# Altium PCB LCD1602接线模块.PCBDOC
Units mm, origin at the board's own origin, x right, y up, seen from the top; angles counter-clockwise.
Board outline 152.4 x 101.6 mm, 2 copper layers (Top Layer, Bottom Layer); 7 components, 14 nets, 47 pads, 0 vias.
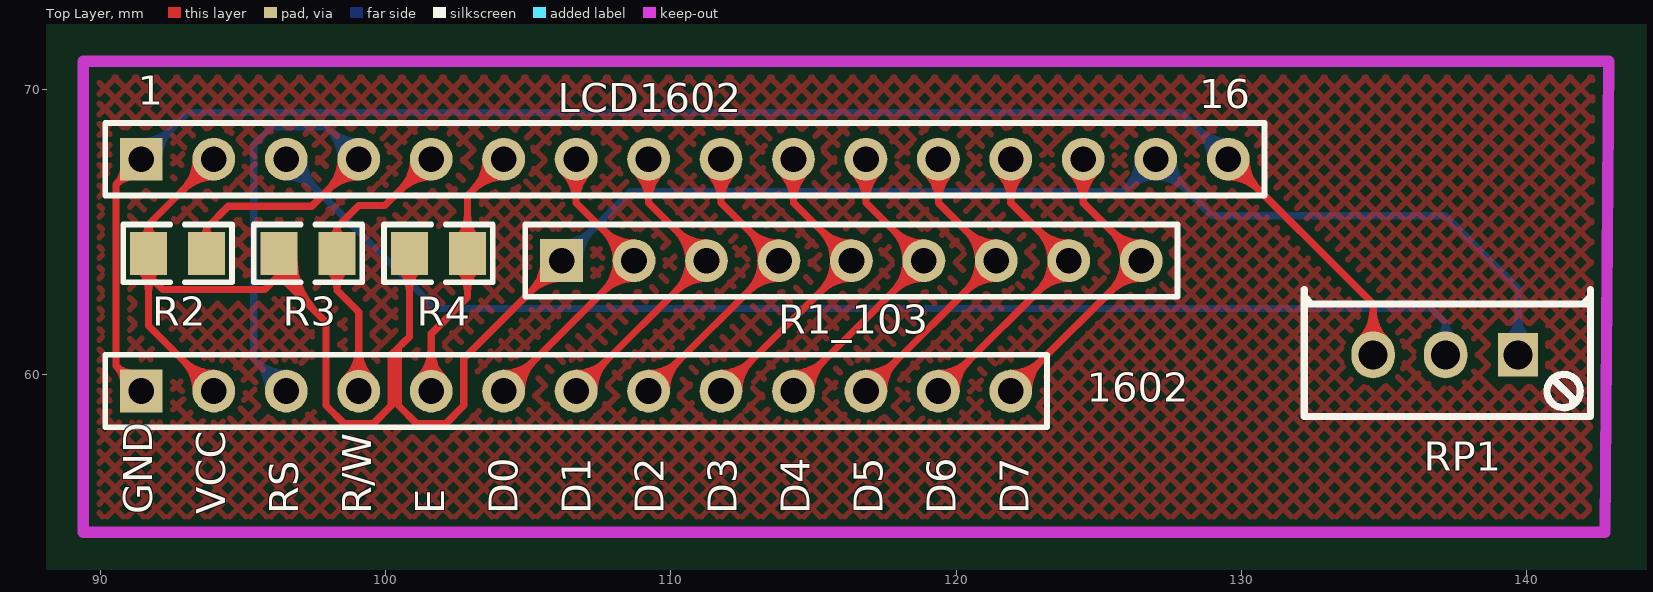
[diagram p0: Top Layer view]
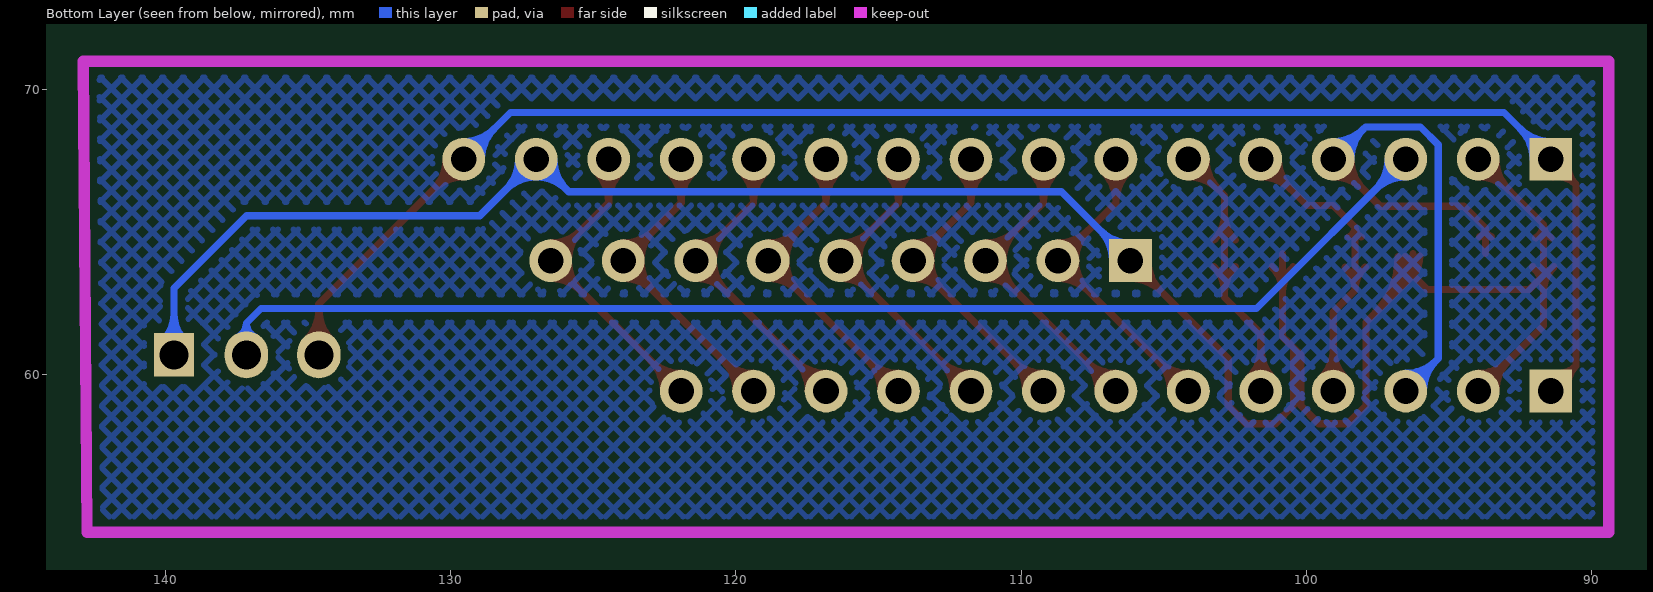
[diagram p1: Bottom Layer view, seen from below]

## Layer stack, top to bottom
Top Layer: signal copper 0.0356
Dielectric: dielectric 0.32, FR-4, Dk 4.8
Bottom Layer: signal copper 0.0356

## Board outline
25.4,25.4 177.8,25.4 177.8,127 25.4,127

## Design rules (kind name [scope] priority, off if disabled: settings)
Clearance [All] p1: gap=0.254
ComponentClearance [All] p1: gap=0.254 collisioncheckmode=3 verticalgap=0.254
PolygonConnect [All] p1: connectstyle=Relief reliefconductorwidth=0.254 reliefentries=4 polygonreliefangle="90 Angle"
RoutingVias [All] p1: holewidth=0.711 width=1.27 viastyle="Through Hole" minholewidth=0.711 minwidth=1.27 maxholewidth=0.711 maxwidth=1.27
SolderMaskExpansion [All] p1: expansion=0.102
TestPointUsage [All] p1: valid=0 allowmultiple=FALSE
Testpoint [All] p1: side=15 testpointundercomponent=TRUE minsize=1.016 maxsize=2.54 preferedsize=1.524 minholesize=0 maxholesize=1.016 preferedholesize=0.813 testpointgrid=0.025 style=1023 order=0123456789
Width [All] p1: maxlimit=0.254 minlimit=0.254 preferedwidth=0.254
17 further rules are at their usual default settings.

## Components (designator, comment, footprint, x,y, rotation, side; value= is the part's Value field where it differs from the comment)
1602 "Header 13" HDR1X13 91.44,59.436 r0 top
LCD1602 "Header 16" HDR1X16 91.44,67.564 r0 top
R1_103 "Header 9" HDR1X9 106.172,64.008 r0 top
R2 "Res" TP-0805-R 90.17,65.532 r180 top
R3 "Res" TP-0805-R 94.742,65.532 r180 top
R4 "Res" TP-0805-R 99.314,65.532 r180 top
RP1 "Res _JT" SIP3-D 139.7,60.96 r180 top

## Footprints (in the part's own frame and the unit in brackets; to place one, negate y for a bottom-side part, rotate by r counter-clockwise, add the part's x,y. Pads: shape width x height; smd on the part's side, far side on the other; paste and mask are expansions set on the pad)
HDR1X9 [mm] "Connector; Header; 9 Position"
  rect 1.5x1.5 hole 0.9: 1(0,0)
  round 1.5 hole 0.9: 2(2.54,0) 3(5.08,0) 4(7.62,0) 5(10.16,0) 6(12.7,0) 7(15.24,0) 8(17.78,0) 9(20.32,0)
  silkscreen extent -1.27,-1.27 21.59,1.27
HDR1X13 [mm] "Connector; Header; 13 Position"
  rect 1.5x1.5 hole 0.9: 1(0,0)
  round 1.5 hole 0.9: 2(2.54,0) 3(5.08,0) 4(7.62,0) 5(10.16,0) 6(12.7,0) 7(15.24,0) 8(17.78,0) 9(20.32,0) 10(22.86,0) 11(25.4,0) 12(27.94,0) 13(30.48,0)
  silkscreen extent -1.27,-1.27 31.75,1.27
HDR1X16 [mm] "Connector; Header; 16 Position"
  rect 1.5x1.5 hole 0.9: 1(0,0)
  round 1.5 hole 0.9: 2(2.54,0) 3(5.08,0) 4(7.62,0) 5(10.16,0) 6(12.7,0) 7(15.24,0) 8(17.78,0) 9(20.32,0) 10(22.86,0) 11(25.4,0) 12(27.94,0) 13(30.48,0) 14(33.02,0) 15(35.56,0) 16(38.1,0)
  silkscreen extent -1.27,-1.27 39.37,1.27
SIP3-D [mil] "精调电位器"
  rect 55x60 hole 40: 1(0,10)
  oval 60x65 hole 40: 2(200,10) 3(100,10)
  silkscreen extent -100,-80 295,95
TP-0805-R [mm] "贴片0805"
  rect 1.3x1.5 smd: 1(-3.556,1.27) 2(-1.524,1.27)
  silkscreen extent -4.44,0.25 -0.64,2.29

## Part data
1602: "Header, 13-Pin"
LCD1602: "Header, 16-Pin"
R1_103: "Header, 9-Pin"
R2 R3 R4: "电阻"
RP1: "j精调电阻"

## Nets (pads, with @x,y where several pads share a name; then routed paths per layer and width w, separated by ;. In a path a pad name is that pad's centre, name@x,y a point inside that pad or via, vN(x,y) a via of type N, cw(c..) or ccw(c..) an arc to the next point about the centre after c; other vN are vias at no path point)
BLA: 1602.2 LCD1602.2 LCD1602.15 R1_103.1 R2.2 R3.2 R4.2 RP1.1 | length 119.1
  Top Layer w0.254: R2.2@91.324,63.792 cw(c90.431,62.899) 91.694,62.899 cw(c92.957,62.899) R2.2@92.064,63.792 ; R2.2@91.428,64.812 ccw(c91.153,65.278) 91.694,65.278 ; R2.2@91.96,64.812 cw(c92.235,65.278) 91.694,65.278 ; 1602.2@93.357,59.436 ccw(c91.853,59.436) 92.916,60.5 ccw(c93.98,61.563) 1602.2@93.98,60.059 ; LCD1602.2@93.357,67.564 cw(c91.853,67.564) 92.916,66.5 cw(c93.98,65.437) LCD1602.2@93.98,66.941 ; 1602.2@93.611,59.436 ccw(c92.72,59.436) 93.35,60.066 ccw(c93.98,60.696) 1602.2@93.98,59.805 ; LCD1602.2@93.611,67.564 cw(c92.72,67.564) 93.35,66.934 cw(c93.98,66.304) LCD1602.2@93.98,67.195 ; 1602.2 91.694,61.722 91.694,63.5 ; LCD1602.2 91.694,65.278 ; R3.2@96.027,64.166 ccw(c97.016,64.149) 96.317,63.449 ; R3.2 96.266,63.5 ; R3.2@96.281,64.162 ccw(c97.848,64.134) 96.74,63.026 ; R3.2@96.535,64.157 ccw(c98.679,64.12) 97.163,62.603 ; R3.2@96.789,64.153 ccw(c99.511,64.105) 97.586,62.18 ; R4.2@100.468,63.792 cw(c99.575,62.899) 100.838,62.899 cw(c102.101,62.899) R4.2@101.208,63.792 ; R4.2 100.838,61.671 100.838,61.341 100.622,61.125 100.457,60.96 ; R1_103.1@105.549,64.008 cw(c104.045,64.008) 105.108,62.944 cw(c106.172,61.881) R1_103.1@106.172,63.385 ; R1_103.1@105.803,64.008 cw(c104.912,64.008) 105.542,63.378 cw(c106.172,62.748) R1_103.1@106.172,63.639 ; R1_103.1 102.743,60.579 102.743,58.928 102.108,58.293 101.092,58.293 100.457,58.928 100.457,60.96 ; R2.2@91.573,63.653 cw(c91.537,63.5) 91.694,63.5 ; R2.2@91.573,63.653 cw(c91.537,63.5) 91.694,63.5 ; R2.2@91.573,63.653 cw(c91.537,63.5) 91.694,63.5 ; 91.694,63.5 cw(c91.851,63.5) R2.2@91.815,63.653 ; 91.694,63.5 cw(c91.851,63.5) R2.2@91.815,63.653 ; 91.694,63.5 cw(c91.851,63.5) R2.2@91.815,63.653 ; 91.694,63.5 92.202,62.992 95.758,62.992 96.266,63.5 ; 91.694,63.5 R2.2 91.694,65.278 ; 96.266,63.5 cw(c96.423,63.5) 96.387,63.653 ccw(c96.423,63.5) 96.266,63.5 ; 96.266,63.5 ccw(c96.109,63.5) 96.145,63.653 cw(c96.109,63.5) 96.266,63.5 ; 96.266,63.5 97.917,61.849 97.917,58.928 98.552,58.293 99.568,58.293 100.203,58.928 100.203,60.706 100.457,60.96
  Bottom Layer w0.254: R1_103.1 108.585,66.421 125.857,66.421 LCD1602.15 128.981,65.583 137.16,65.583 139.7,63.043 RP1.1 ; R1_103.1@106.172,64.377 ccw(c106.172,65.268) 106.802,64.638 ccw(c107.432,64.008) R1_103.1@106.541,64.008 ; R1_103.1@106.172,64.631 ccw(c106.172,66.135) 107.236,65.072 ccw(c108.299,64.008) R1_103.1@106.795,64.008 ; LCD1602.15@126.377,67.564 cw(c124.873,67.564) 125.936,66.5 cw(c127,65.437) 127,66.941 cw(c127,65.437) 128.064,66.5 cw(c129.127,67.564) LCD1602.15@127.623,67.564 ; LCD1602.15@126.631,67.564 cw(c125.74,67.564) 126.37,66.934 cw(c127,66.304) 127,67.195 cw(c127,66.304) 127.63,66.934 cw(c128.26,67.564) LCD1602.15@127.369,67.564 ; RP1.1@139.296,61.174 ccw(c138.32,62.149) 139.7,62.149 ccw(c141.08,62.149) RP1.1@140.104,61.174 ; RP1.1@139.475,60.994 ccw(c138.933,61.536) 139.7,61.536 ccw(c140.467,61.536) RP1.1@139.925,60.994
BLK: 1602.1 LCD1602.1 LCD1602.16 RP1.2 | length 75.9
  Top Layer w0.254: 1602.1@90.823,59.52 ccw(c89.874,59.648) 90.551,60.325 ; LCD1602.1@90.823,67.48 cw(c89.874,67.352) 90.551,66.675 ; 1602.1@91.356,60.053 cw(c91.228,61.002) 90.551,60.325 ; LCD1602.1@91.356,66.947 ccw(c91.228,65.998) 90.551,66.675 ; 1602.1 90.551,60.325 ; LCD1602.1 90.551,66.675 ; LCD1602.16@129.54,66.941 cw(c129.54,65.437) 130.604,66.5 cw(c131.667,67.564) LCD1602.16@130.163,67.564 ; LCD1602.16@129.54,67.195 cw(c129.54,66.304) 130.17,66.934 cw(c130.8,67.564) LCD1602.16@129.909,67.564 ; LCD1602.16 134.62,62.484 RP1.2 ; RP1.2@134.171,61.219 ccw(c133.087,62.303) 134.62,62.303 ccw(c136.153,62.303) RP1.2@135.069,61.219 ; RP1.2@134.351,61.039 ccw(c133.7,61.689) 134.62,61.689 ccw(c135.54,61.689) RP1.2@134.889,61.039 ; 90.551,60.325 90.551,66.675
  Bottom Layer w0.254: LCD1602.1 93.079,69.203 127.901,69.203 LCD1602.16 ; LCD1602.1@91.44,67.933 ccw(c91.44,68.824) 92.07,68.194 ccw(c92.7,67.564) LCD1602.1@91.809,67.564 ; LCD1602.1@91.44,68.187 ccw(c91.44,69.691) 92.504,68.628 ccw(c93.567,67.564) LCD1602.1@92.063,67.564 ; LCD1602.16@128.917,67.564 ccw(c127.413,67.564) 128.476,68.628 ccw(c129.54,69.691) LCD1602.16@129.54,68.187 ; LCD1602.16@129.171,67.564 ccw(c128.28,67.564) 128.91,68.194 ccw(c129.54,68.824) LCD1602.16@129.54,67.933
D0: 1602.6 LCD1602.7 R1_103.2 | length 26
  Top Layer w0.254: 1602.6 R1_103.2 ; 1602.6@104.14,59.805 ccw(c104.14,60.696) 104.77,60.066 ccw(c105.4,59.436) 1602.6@104.509,59.436 ; 1602.6@104.14,60.059 ccw(c104.14,61.563) 105.204,60.5 ccw(c106.267,59.436) 1602.6@104.763,59.436 ; LCD1602.7@106.239,67.123 cw(c105.176,66.06) 106.68,66.06 cw(c108.184,66.06) LCD1602.7@107.121,67.123 ; LCD1602.7@106.419,67.303 cw(c105.789,66.673) 106.68,66.673 cw(c107.571,66.673) LCD1602.7@106.941,67.303 ; LCD1602.7 106.68,66.04 R1_103.2 ; R1_103.2@108.712,63.385 ccw(c108.712,61.881) 107.648,62.944 ccw(c106.585,64.008) 108.089,64.008 ccw(c106.585,64.008) 107.648,65.072 ccw(c108.712,66.135) R1_103.2@108.712,64.631 ; R1_103.2@108.712,63.639 ccw(c108.712,62.748) 108.082,63.378 ccw(c107.452,64.008) 108.343,64.008 ccw(c107.452,64.008) 108.082,64.638 ccw(c108.712,65.268) R1_103.2@108.712,64.377 ; R1_103.2@108.712,63.881 R1_103.2
D1: 1602.7 LCD1602.8 R1_103.3 | length 25.9
  Top Layer w0.254: 1602.7 R1_103.3 109.22,66.04 LCD1602.8 ; 1602.7@106.68,59.805 ccw(c106.68,60.696) 107.31,60.066 ccw(c107.94,59.436) 1602.7@107.049,59.436 ; 1602.7@106.68,60.059 ccw(c106.68,61.563) 107.744,60.5 ccw(c108.807,59.436) 1602.7@107.303,59.436 ; LCD1602.8@108.779,67.123 cw(c107.716,66.06) 109.22,66.06 cw(c110.724,66.06) LCD1602.8@109.661,67.123 ; LCD1602.8@108.959,67.303 cw(c108.329,66.673) 109.22,66.673 cw(c110.111,66.673) LCD1602.8@109.481,67.303 ; R1_103.3@111.252,63.385 ccw(c111.252,61.881) 110.188,62.944 ccw(c109.125,64.008) 110.629,64.008 ccw(c109.125,64.008) 110.188,65.072 ccw(c111.252,66.135) R1_103.3@111.252,64.631 ; R1_103.3@111.252,63.639 ccw(c111.252,62.748) 110.622,63.378 ccw(c109.992,64.008) 110.883,64.008 ccw(c109.992,64.008) 110.622,64.638 ccw(c111.252,65.268) R1_103.3@111.252,64.377
D2: 1602.8 LCD1602.9 R1_103.4 | length 25.9
  Top Layer w0.254: 1602.8 R1_103.4 111.76,66.04 LCD1602.9 ; 1602.8@109.22,59.805 ccw(c109.22,60.696) 109.85,60.066 ccw(c110.48,59.436) 1602.8@109.589,59.436 ; 1602.8@109.22,60.059 ccw(c109.22,61.563) 110.284,60.5 ccw(c111.347,59.436) 1602.8@109.843,59.436 ; LCD1602.9@111.319,67.123 cw(c110.256,66.06) 111.76,66.06 cw(c113.264,66.06) LCD1602.9@112.201,67.123 ; LCD1602.9@111.499,67.303 cw(c110.869,66.673) 111.76,66.673 cw(c112.651,66.673) LCD1602.9@112.021,67.303 ; R1_103.4@113.792,63.385 ccw(c113.792,61.881) 112.728,62.944 ccw(c111.665,64.008) 113.169,64.008 ccw(c111.665,64.008) 112.728,65.072 ccw(c113.792,66.135) R1_103.4@113.792,64.631 ; R1_103.4@113.792,63.639 ccw(c113.792,62.748) 113.162,63.378 ccw(c112.532,64.008) 113.423,64.008 ccw(c112.532,64.008) 113.162,64.638 ccw(c113.792,65.268) R1_103.4@113.792,64.377
D3: 1602.9 LCD1602.10 R1_103.5 | length 25.9
  Top Layer w0.254: 1602.9 R1_103.5 114.3,66.04 LCD1602.10 ; 1602.9@111.76,59.805 ccw(c111.76,60.696) 112.39,60.066 ccw(c113.02,59.436) 1602.9@112.129,59.436 ; 1602.9@111.76,60.059 ccw(c111.76,61.563) 112.824,60.5 ccw(c113.887,59.436) 1602.9@112.383,59.436 ; LCD1602.10@113.859,67.123 cw(c112.796,66.06) 114.3,66.06 cw(c115.804,66.06) LCD1602.10@114.741,67.123 ; LCD1602.10@114.039,67.303 cw(c113.409,66.673) 114.3,66.673 cw(c115.191,66.673) LCD1602.10@114.561,67.303 ; R1_103.5@116.332,63.385 ccw(c116.332,61.881) 115.268,62.944 ccw(c114.205,64.008) 115.709,64.008 ccw(c114.205,64.008) 115.268,65.072 ccw(c116.332,66.135) R1_103.5@116.332,64.631 ; R1_103.5@116.332,63.639 ccw(c116.332,62.748) 115.702,63.378 ccw(c115.072,64.008) 115.963,64.008 ccw(c115.072,64.008) 115.702,64.638 ccw(c116.332,65.268) R1_103.5@116.332,64.377
D4: 1602.10 LCD1602.11 R1_103.6 | length 25.9
  Top Layer w0.254: 1602.10 R1_103.6 116.84,66.04 LCD1602.11 ; 1602.10@114.3,59.805 ccw(c114.3,60.696) 114.93,60.066 ccw(c115.56,59.436) 1602.10@114.669,59.436 ; 1602.10@114.3,60.059 ccw(c114.3,61.563) 115.364,60.5 ccw(c116.427,59.436) 1602.10@114.923,59.436 ; LCD1602.11@116.399,67.123 cw(c115.336,66.06) 116.84,66.06 cw(c118.344,66.06) LCD1602.11@117.281,67.123 ; LCD1602.11@116.579,67.303 cw(c115.949,66.673) 116.84,66.673 cw(c117.731,66.673) LCD1602.11@117.101,67.303 ; R1_103.6@118.872,63.385 ccw(c118.872,61.881) 117.808,62.944 ccw(c116.745,64.008) 118.249,64.008 ccw(c116.745,64.008) 117.808,65.072 ccw(c118.872,66.135) R1_103.6@118.872,64.631 ; R1_103.6@118.872,63.639 ccw(c118.872,62.748) 118.242,63.378 ccw(c117.612,64.008) 118.503,64.008 ccw(c117.612,64.008) 118.242,64.638 ccw(c118.872,65.268) R1_103.6@118.872,64.377
D5: 1602.11 LCD1602.12 R1_103.7 | length 25.9
  Top Layer w0.254: 1602.11 R1_103.7 119.38,66.04 LCD1602.12 ; 1602.11@116.84,59.805 ccw(c116.84,60.696) 117.47,60.066 ccw(c118.1,59.436) 1602.11@117.209,59.436 ; 1602.11@116.84,60.059 ccw(c116.84,61.563) 117.904,60.5 ccw(c118.967,59.436) 1602.11@117.463,59.436 ; LCD1602.12@118.939,67.123 cw(c117.876,66.06) 119.38,66.06 cw(c120.884,66.06) LCD1602.12@119.821,67.123 ; LCD1602.12@119.119,67.303 cw(c118.489,66.673) 119.38,66.673 cw(c120.271,66.673) LCD1602.12@119.641,67.303 ; R1_103.7@121.412,63.385 ccw(c121.412,61.881) 120.348,62.944 ccw(c119.285,64.008) 120.789,64.008 ccw(c119.285,64.008) 120.348,65.072 ccw(c121.412,66.135) R1_103.7@121.412,64.631 ; R1_103.7@121.412,63.639 ccw(c121.412,62.748) 120.782,63.378 ccw(c120.152,64.008) 121.043,64.008 ccw(c120.152,64.008) 120.782,64.638 ccw(c121.412,65.268) R1_103.7@121.412,64.377
D6: 1602.12 LCD1602.13 R1_103.8 | length 25.9
  Top Layer w0.254: 1602.12 R1_103.8 121.92,66.04 LCD1602.13 ; 1602.12@119.38,59.805 ccw(c119.38,60.696) 120.01,60.066 ccw(c120.64,59.436) 1602.12@119.749,59.436 ; 1602.12@119.38,60.059 ccw(c119.38,61.563) 120.444,60.5 ccw(c121.507,59.436) 1602.12@120.003,59.436 ; LCD1602.13@121.479,67.123 cw(c120.416,66.06) 121.92,66.06 cw(c123.424,66.06) LCD1602.13@122.361,67.123 ; LCD1602.13@121.659,67.303 cw(c121.029,66.673) 121.92,66.673 cw(c122.811,66.673) LCD1602.13@122.181,67.303 ; R1_103.8@123.952,63.385 ccw(c123.952,61.881) 122.888,62.944 ccw(c121.825,64.008) 123.329,64.008 ccw(c121.825,64.008) 122.888,65.072 ccw(c123.952,66.135) R1_103.8@123.952,64.631 ; R1_103.8@123.952,63.639 ccw(c123.952,62.748) 123.322,63.378 ccw(c122.692,64.008) 123.583,64.008 ccw(c122.692,64.008) 123.322,64.638 ccw(c123.952,65.268) R1_103.8@123.952,64.377
D7: 1602.13 LCD1602.14 R1_103.9 | length 25.9
  Top Layer w0.254: 1602.13 R1_103.9 124.46,66.04 LCD1602.14 ; 1602.13@121.92,59.805 ccw(c121.92,60.696) 122.55,60.066 ccw(c123.18,59.436) 1602.13@122.289,59.436 ; 1602.13@121.92,60.059 ccw(c121.92,61.563) 122.984,60.5 ccw(c124.047,59.436) 1602.13@122.543,59.436 ; LCD1602.14@124.019,67.123 cw(c122.956,66.06) 124.46,66.06 cw(c125.964,66.06) LCD1602.14@124.901,67.123 ; LCD1602.14@124.199,67.303 cw(c123.569,66.673) 124.46,66.673 cw(c125.351,66.673) LCD1602.14@124.721,67.303 ; R1_103.9@126.492,63.385 ccw(c126.492,61.881) 125.428,62.944 ccw(c124.365,64.008) 125.869,64.008 ccw(c124.365,64.008) 125.428,65.072 ccw(c126.492,66.135) R1_103.9@126.492,64.631 ; R1_103.9@126.492,63.639 ccw(c126.492,62.748) 125.862,63.378 ccw(c125.232,64.008) 126.123,64.008 ccw(c125.232,64.008) 125.862,64.638 ccw(c126.492,65.268) R1_103.9@126.492,64.377
E: 1602.5 LCD1602.6 R4.1 | length 20.7
  Top Layer w0.254: 1602.5@101.159,59.877 ccw(c100.096,60.94) 101.6,60.94 ccw(c103.104,60.94) 1602.5@102.041,59.877 ; 1602.5@101.339,59.697 ccw(c100.709,60.327) 101.6,60.327 ccw(c102.491,60.327) 1602.5@101.861,59.697 ; 1602.5 101.6,61.443 102.87,62.713 R4.1 102.87,66.294 LCD1602.6 ; R4.1@102.5,63.792 cw(c101.607,62.899) 102.87,62.899 cw(c104.133,62.899) R4.1@103.24,63.792 ; R4.1@102.5,64.732 ccw(c101.607,65.625) 102.87,65.625 ccw(c104.133,65.625) R4.1@103.24,64.732 ; LCD1602.6@103.517,67.564 cw(c102.013,67.564) 103.076,66.5 cw(c104.14,65.437) LCD1602.6@104.14,66.941 ; LCD1602.6@103.771,67.564 cw(c102.88,67.564) 103.51,66.934 cw(c104.14,66.304) LCD1602.6@104.14,67.195
R/W: 1602.4 LCD1602.5 R3.1 | length 20.5
  Top Layer w0.254: R3.1@97.943,63.778 cw(c97.194,62.967) 98.298,62.967 ; R3.1@98.08,64.838 ccw(c97.925,65.176) 98.298,65.176 ; R3.1@98.516,64.838 cw(c98.671,65.176) 98.298,65.176 ; 1602.4@98.619,59.877 ccw(c97.556,60.94) 99.06,60.94 ccw(c100.564,60.94) 1602.4@99.501,59.877 ; R3.1@98.653,63.778 ccw(c99.402,62.967) 98.298,62.967 ; 1602.4@98.799,59.697 ccw(c98.169,60.327) 99.06,60.327 ccw(c99.951,60.327) 1602.4@99.321,59.697 ; 1602.4 99.06,62.205 98.298,62.967 ; LCD1602.5@100.977,67.564 cw(c99.473,67.564) 100.536,66.5 cw(c101.6,65.437) LCD1602.5@101.6,66.941 ; LCD1602.5@101.231,67.564 cw(c100.34,67.564) 100.97,66.934 cw(c101.6,66.304) LCD1602.5@101.6,67.195 ; LCD1602.5 99.974,65.938 99.06,65.938 98.298,65.176 ; 98.298,62.967 R3.1 98.298,65.176
RS: 1602.3 LCD1602.4 R2.1 | length 32.8
  Top Layer w0.254: R2.1@93.522,64.844 ccw(c93.392,65.151) 93.726,65.151 ; R2.1 93.726,65.151 ; R2.1@93.93,64.844 cw(c94.06,65.151) 93.726,65.151 ; LCD1602.4@98.437,67.564 cw(c96.933,67.564) 97.996,66.5 cw(c99.06,65.437) LCD1602.4@99.06,66.941 ; LCD1602.4@98.691,67.564 cw(c97.8,67.564) 98.43,66.934 cw(c99.06,66.304) LCD1602.4@99.06,67.195 ; LCD1602.4 97.409,65.913 94.488,65.913 93.726,65.151
  Bottom Layer w0.254: 1602.3@95.897,59.436 ccw(c94.393,59.436) 95.456,60.5 ccw(c96.52,61.563) 1602.3@96.52,60.059 ; 1602.3@96.151,59.436 ccw(c95.26,59.436) 95.89,60.066 ccw(c96.52,60.696) 1602.3@96.52,59.805 ; 1602.3 95.377,60.579 95.377,68.072 96,68.695 97.929,68.695 LCD1602.4 ; LCD1602.4@98.437,67.564 ccw(c96.933,67.564) 97.996,68.628 ccw(c99.06,69.691) LCD1602.4@99.06,68.187 ; LCD1602.4@98.691,67.564 ccw(c97.8,67.564) 98.43,68.194 ccw(c99.06,68.824) LCD1602.4@99.06,67.933
VL: LCD1602.3 RP1.3 | length 49.1
  Bottom Layer w0.254: LCD1602.3@96.52,66.941 cw(c96.52,65.437) 97.584,66.5 cw(c98.647,67.564) LCD1602.3@97.143,67.564 ; LCD1602.3@96.52,67.195 cw(c96.52,66.304) 97.15,66.934 cw(c97.78,67.564) LCD1602.3@96.889,67.564 ; LCD1602.3 101.752,62.332 136.652,62.332 137.16,61.824 ; RP1.3@136.863,61.331 ccw(c136.603,61.824) 137.16,61.824 ; RP1.3 137.16,61.824 ; RP1.3@137.457,61.331 cw(c137.717,61.824) 137.16,61.824

## Polygon pours and split planes (outlines as drawn)
no net on Top Layer (hatched 45Degree grid 0.508 track 0.203): 89.408,70.993 89.408,54.61 142.748,54.61 142.748,70.739 89.662,70.739 89.662,70.993
no net on Bottom Layer (hatched 45Degree grid 0.508 track 0.203): 89.408,70.993 89.408,54.61 142.748,54.61 142.748,70.739 89.535,70.739 89.535,70.866

## Keep-outs
Keep-Out Layer:
  lines w0.4: 89.408,54.483 142.621,54.483 142.748,54.483 142.875,70.993 89.408,70.993 89.408,54.483

## Silkscreen, mask and mechanical layers (free items; w line width, h text height)
Top Overlay:
  text "1" at 91.313,69.469 h1.02
  text "16" at 128.524,69.342 h1.02
  text "GND" at 91.821,55.118 h1.02 r90
  text "VCC" at 94.382,55.118 h1.02 r90
  text "RS" at 96.943,55.118 h1.02 r90
  text "R/W" at 99.504,55.118 h1.02 r90
  text "E" at 102.066,55.118 h1.02 r90
  text "D0" at 104.627,55.118 h1.02 r90
  text "D1" at 107.188,55.118 h1.02 r90
  text "D2" at 109.749,55.118 h1.02 r90
  text "D3" at 112.31,55.118 h1.02 r90
  text "D4" at 114.871,55.118 h1.02 r90
  text "D5" at 117.433,55.118 h1.02 r90
  text "D6" at 119.994,55.118 h1.02 r90
  text "D7" at 122.555,55.118 h1.02 r90
Mechanical 1:
  lines w0.4: 89.408,54.483 142.494,54.483 142.748,54.483 142.748,70.866 89.408,70.866 89.408,54.483